# EAGLE board 602009781c (EAGLE 5.06)
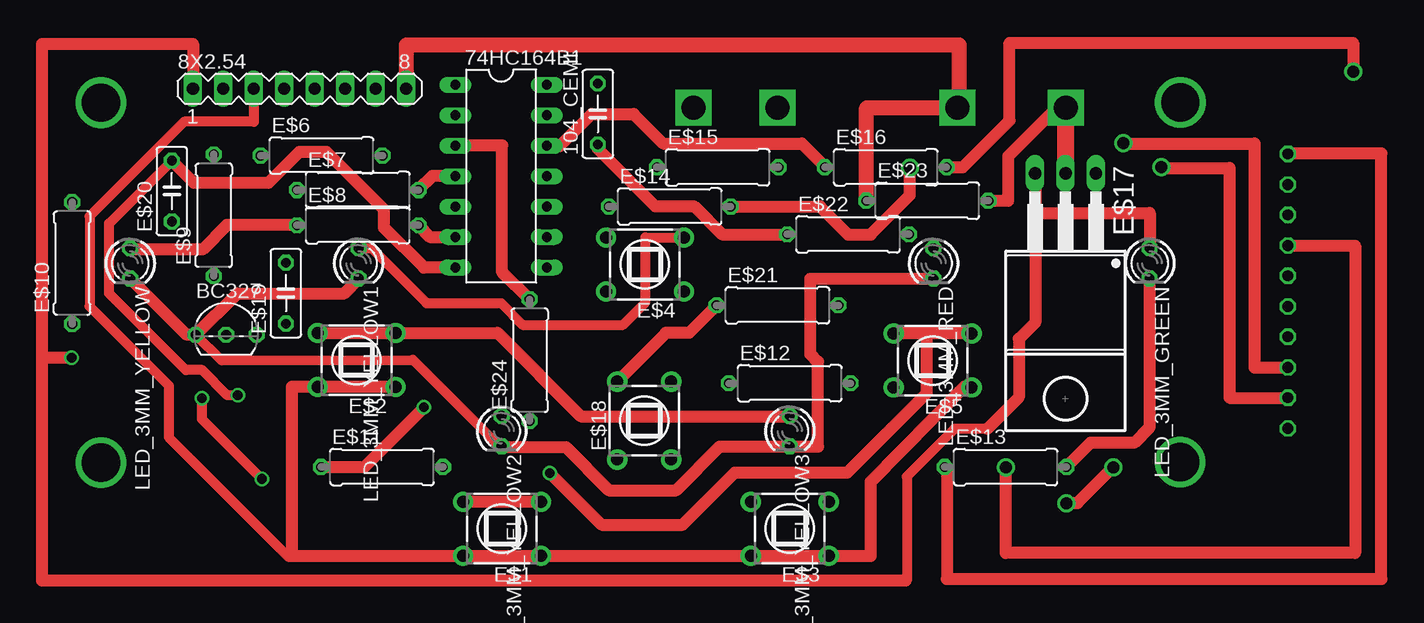
[diagram p0: board, top side]
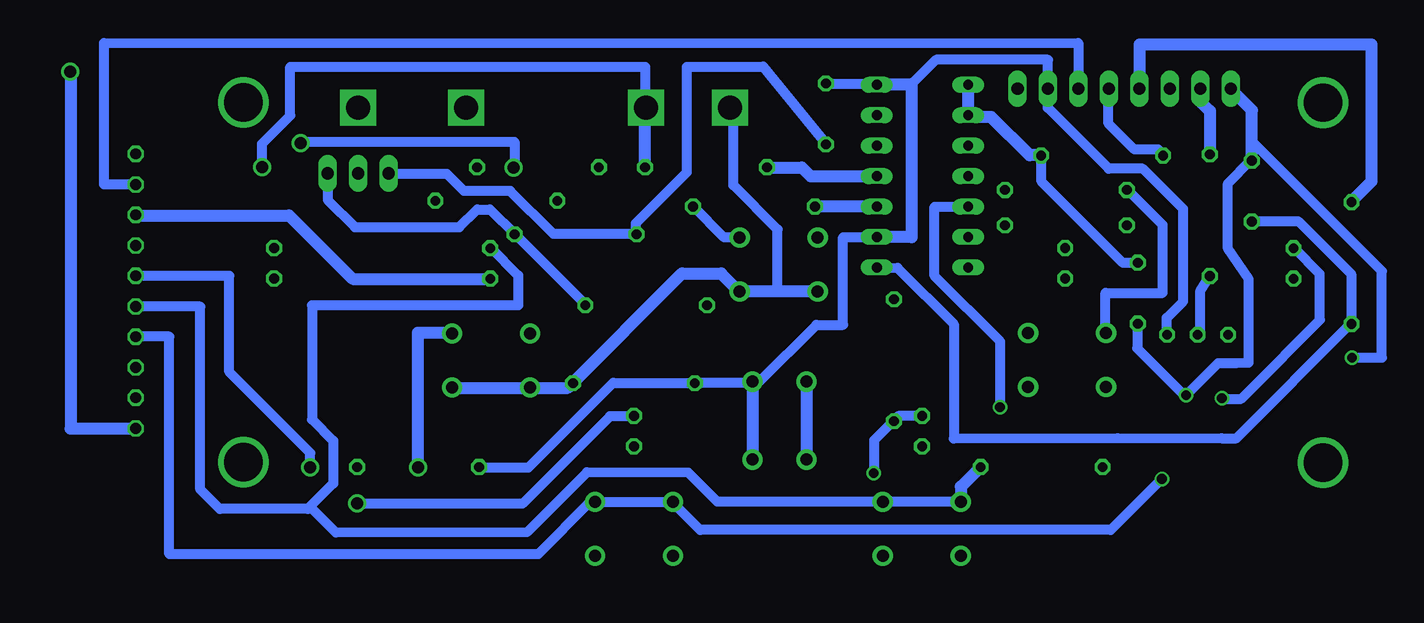
[diagram p1: board, bottom side, seen from below]

No outline drawn. Coordinates in mm, seen from the top.
Copper layers (1*16): Top 0.035mm / dielectric 1.5mm / Bottom 0.035mm
Design rules "default": minimum track width 10mil, minimum drill 24mil, track to track 8mil, track to pad 8mil, pad to pad 8mil, via to via 8mil, smd to smd 8mil, copper to edge 40mil, drill to drill 8mil, minimum pad ring 10mil, minimum via ring 8mil, stop-mask expansion 4mil, vias tented up to drill 0mil, thermal gap 10mil

## Footprints (pad centres in the part's own frame; a part is rotated, then mirrored left to right if it is on the bottom)
MA08-1 = drill 1.016 long: 1 -8.89,0; 2 -6.35,0; 3 -3.81,0; 4 -1.27,0; 5 1.27,0; 6 3.81,0; 7 6.35,0; 8 8.89,0
DIL14 = drill 0.813 long: 1 -7.62,-3.81; 2 -5.08,-3.81; 3 -2.54,-3.81; 4 0,-3.81; 5 2.54,-3.81; 6 5.08,-3.81; 7 7.62,-3.81; 8 7.62,3.81; 9 5.08,3.81; 10 2.54,3.81; 11 0,3.81; 12 -2.54,3.81; 13 -5.08,3.81; 14 -7.62,3.81
C050-025X075 = drill 0.813 octagon: 1 -2.54,0; 2 2.54,0
TO92- = drill 0.813 octagon: 1 -2.54,0; 2 0,0; 3 2.54,0
TL1105SP = drill 1 pad 1.676 round: 1 -2.25,3.25; 2 2.25,3.25; 3 -2.25,-3.25; 4 2.25,-3.25
0309/10 = drill 0.813 octagon: 1 -5.08,0; 2 5.08,0
T03B = drill 1.016 long: 1 -2.54,-11.43; 2 0,-11.43; 3 2.54,-11.43
LED3MM = drill 0.813 octagon: A -1.27,0; K 1.27,0

## Placement (x,y rotation side)
8X2.54  [MA08-1]  22.14,41.56 0 top
74HC164B1  [DIL14]  38.95,34.27 270 top
104_CEMI  [C050-025X075]  47.01,39.46 90 top
BC327  [TO92-]  16.02,21.04 0 top
E$1  [TL1105SP]  39.02,4.87 90 top
E$2  [TL1105SP]  26.9,18.93 90 top
E$3  [TL1105SP]  63.01,4.87 90 top
E$4  [TL1105SP]  50.94,26.9 90 top
E$5  [TL1105SP]  74.92,18.89 90 top
E$6  [0309/10]  23.98,35.99 0 top
E$7  [0309/10]  27,33.12 0 top
E$8  [0309/10]  27,30.17 0 top
E$9  [0309/10]  15,31.01 90 top
E$10  [0309/10]  3.19,27.02 90 top
E$11  [0309/10]  29.02,10.01 0 top
E$12  [0309/10]  63.01,17 0 top
E$13  [0309/10]  81,10.01 0 top
E$14  [0309/10]  53,31.74 0 top
E$15  [0309/10]  57,35.01 0 top
E$16  [0309/10]  71.01,35.01 0 top
E$17  [T03B]  86,23.07 180 top
E$18  [TL1105SP]  50.88,13.88 0 top
E$19  [C050-025X075]  21.01,24.51 90 top
E$20  [C050-025X075]  11.5,33.02 90 top
E$21  [0309/10]  61.99,23.5 0 top
E$22  [0309/10]  67.87,29.42 0 top
E$23  [0309/10]  74.48,32.22 0 top
E$24  [0309/10]  41.33,18.92 90 top
LED_3MM_GREEN  8mm ponad pow pcb  [LED3MM]  93.01,27 270 top
LED_3MM_RED  8mm nad pow pcb  [LED3MM]  74.99,26.99 270 top
LED_3MM_YELLOW  8mm ponad pow pcb  [LED3MM]  8.02,26.99 270 top
LED_3MM_YELLOW1  8mm ponad pow pcb  [LED3MM]  27.06,27 270 top
LED_3MM_YELLOW2  8mm ponad pow pcb  [LED3MM]  38.99,13 270 top
LED_3MM_YELLOW3  8mm ponad pow pcb  [LED3MM]  63.01,13.01 270 top

## Library data of the parts
8X2.54 = con-lstb
74HC164B1 = 40xx
104_CEMI E$6-E$16 E$19-E$24 = rcl
BC327 = maxim
E$1-E$5 E$18 = switch
E$17 = linear
LED_3MM_GREEN LED_3MM_RED LED_3MM_YELLOW LED_3MM_YELLOW1-LED_3MM_YELLOW3 = led

## Nets
S$25: E$23.2
S$27: E$16.2
S$99: E$21.2
S$113: 8X2.54.4

## Tracks (layer width: path | path; a pad name or v marks a point on that pad's centre or on a via)
S$1  (via drill 3.2)
  other vias: 5.58,40.4 5.58,10.38 95.57,40.42 95.55,10.43
S$2  (via drill 2)
  other vias: 55,39.99
S$3  (via drill 2)
  other vias: 61.99,39.99
S$4  (via drill 2)
  other vias: 77,39.99
S$5  (via drill 2)
  other vias: 86.02,39.99
S$6  (via drill 0.8)
  other vias: 3.15,19.14
S$7  (via drill 0.8)
  other vias: 14,15.74
S$8  (via drill 0.8)
  other vias: 16.99,15.99
S$9  (via drill 0.8)
  other vias: 19,9.02
S$10  (via drill 0.8)
  other vias: 32.5,15
S$11  (via drill 0.8)
  other vias: 43.01,9.51
S$12  (via drill 0.9)
  other vias: 104.54,15.8
S$13  (via drill 0.9)
  other vias: 104.54,18.32
S$14  (via drill 0.9)
  other vias: 104.54,20.88
S$15  (via drill 0.9)
  other vias: 104.54,23.4
S$16  (via drill 0.9)
  other vias: 104.54,25.96
S$17  (via drill 0.9)
  other vias: 104.54,28.49
S$18  (via drill 0.9)
  other vias: 104.54,31.05
S$19  (via drill 0.9)
  other vias: 104.54,33.57
S$20  (via drill 0.9)
  other vias: 104.54,36.13
S$21  (via drill 1)
  other vias: 90.81,37.01
S$22  (via drill 1)
  other vias: 94,35.01
S$23  (via drill 1)
  other vias: 86.08,7
S$24
  Top 1.422: 86.03,34.46 86.03,40.09
S$25
  Top 1.016: E$23.2 81.22,32.22 81.22,35.92 84.96,39.66
S$26  (via drill 1)
  other vias: 109.99,42.99
S$27
  Top 1.016: E$16.2 77.43,35.01 81.33,38.91 81.33,45.38 109.98,45.38 109.98,42.91
S$28
  Top 1.016: 56.92,23.5 54.62,21.2 52.69,21.2 48.61,17.12
S$29
  Top 1.016: 23.93,10.04 27.57,10.04 32.52,14.99
S$30
  Top 1.016: 30.14,16.7 21.5,16.7 21.5,2.59 66.32,2.59
S$31  (via drill 1)
  other vias: 90,10
S$32
  Top 1.016: 86.08,7.02 87,7.02 90,10.02
S$33
  Top 1.016: 93,25.72 93,13.32 91.72,12.04 88.08,12.04 86.08,10.04
S$34
  Top 1.016: 76.11,9.99 76.11,0.68 112.34,0.68 112.34,36.15 104.58,36.15
S$35  (via drill 1)
  other vias: 81.01,10
S$36
  Top 1.016: 104.53,28.48 110.14,28.48 110.14,2.84 81.02,2.84 81.02,10.04
S$37
  Top 1.016: 90.82,36.99 101.75,36.99 101.75,18.31 104.61,18.31
S$38
  Top 1.016: 94,34.95 99.67,34.95 99.67,15.78 104.57,15.78
S$39
  Bottom 1.016: 109.97,43.08 109.97,13.23 104.47,13.23
S$40
  Top 1.016: 83.47,34.5 83.47,31.19 93.01,31.19 93.01,28.24
S$41
  Top 1.016: 8.04,25.72 12.69,21.07 13.46,21.07
S$42
  Top 1.016: 35.14,34.28 33.22,34.28 32.08,33.14
S$43
  Top 1.016: 35.17,29.15 33.07,29.15 32.05,30.17
S$44
  Top 1.016: 21.94,30.2 16.09,30.2 14.05,28.16 8.01,28.16
S$45
  Top 0.813: 13.99,15.74 13.99,14.02 19.02,8.99
S$46
  Bottom 1.016: 34.06,10.06 35.76,8.36 35.76,7.05
S$47
  Top 0.813: 13.39,21.12 15.64,18.9 31.6,18.94 38.91,11.63
S$48
  Top 1.016: 35.77,7.13 42.31,7.13 42.31,7.15
S$49
  Top 1.016: 71.69,21.17 78.27,21.17 78.27,21.11
S$50
  Top 1.016: 38.95,11.68 44.32,11.68 47.92,8.08 53.55,8.08 57.19,11.72 65.37,11.72 65.37,18.78 64.72,19.43 64.72,25.72 75.04,25.72
S$51
  Top 1.016: 23.65,21.19 38.65,21.19 45.59,14.25 63.05,14.25
S$52
  Top 1.016: 41.27,24.01 39.03,26.25 39.03,36.83 35.15,36.83
S$53
  Top 1.016: 42.75,36.77 43.8,36.77 46.49,39.46 50,39.46 52.46,37 64.01,37 66,35.01
S$54
  Top 1.016: 47.02,36.91 47.02,36.53 51.79,31.76 55.02,31.76 57.38,29.4 62.89,29.4
S$55  (via drill 1)
  other vias: 73.04,34.99
S$56
  Top 1.27: 69.41,32.21 69.41,39.97 77,39.97
S$57
  Top 1.016: 58.09,31.74 65.53,31.74 67.88,29.39 69.74,29.39 73.02,32.67 73.02,35.03
S$58
  Top 1.27: 77.15,39.89 77.15,45.19 31.03,45.19 31.03,41.52
S$59
  Top 1.016: 43.02,9.5 47.33,5.19 54.08,5.19 58.44,9.55 67.81,9.55 74.44,16.21 74.44,21.06 74.49,21.11
S$60
  Top 1.016: 78.18,16.66 77.54,16.69 69.74,8.79 69.74,2.57 65.99,2.57
S$61
  Top 0.813: 17.01,16 16.12,16 14.03,18.09 12.66,18.09 6.26,24.49 6.26,30.32 11.55,35.61
S$62
  Top 0.813: 18.33,41.58 18.33,38.81 12.52,38.81 4.64,30.93 4.64,23.41 11.25,16.8 11.25,12.49 21.24,2.5
S$63
  Top 0.813: 79.47,13.19 76.73,13.19 72.76,9.22 72.76,0.53 72.69,0.53
  Top 1.016: 83.48,34.52 83.48,22.06 82.11,20.69 82.11,15.83 79.47,13.19 | 72.69,0.53 0.69,0.53 0.69,19.15 3.14,19.15
S$64
  Top 1.016: 3.13,19.12 0.69,19.12 0.69,45.3 13.27,45.3 13.27,41.38
S$65
  Top 1.016: 35.17,26.63 32.52,26.63 29.19,29.96 29.19,31.5 24.4,36.29 22.12,36.29 19.54,33.71 13.35,33.71 11.52,35.54
S$66
  Bottom 1.016: 11.49,35.51 11.49,39.77 13.25,41.53
S$67
  Bottom 1.016: 15.8,41.53 15.8,40.5 14.99,39.69 14.99,36.02
S$68
  Bottom 0.813: 17.05,15.93 14.31,18.67 12.8,18.67 11.76,18.72 11.76,25.67 13.5,28.22 13.5,33.66 11.57,35.59
S$69
  Bottom 0.813: 18.84,36.02 19.31,36.49 21.29,36.49 23.46,38.66 23.46,41.6
S$70
  Bottom 0.813: 14.02,15.69 12.38,15.69 11.62,16.45
S$71
  Bottom 0.813: 11.48,30.47 11.26,30.52 7.63,30.52 3.23,26.12 3.23,21.97
S$72
  Bottom 0.813: 104.56,33.58 107.18,33.58 107.17,45.36 25.97,45.39 25.97,41.44
S$73
  Bottom 0.813: 28.5,41.58 28.5,43.97 37.82,43.97 39.86,41.93 47.03,41.93
S$74
  Bottom 0.813: 54.18,29.16 55.49,29.16 58.06,31.73
S$75
  Bottom 1.016: 42.74,31.72 47.92,31.72
S$76
  Bottom 1.016: 51.92,34.99 49.02,34.99 48.29,34.26 42.58,34.26
S$77
  Bottom 1.016: 29.02,36.01 30.04,36.01 33.24,39.21 35.11,39.21 35.11,41.96
S$78
  Top 0.813: 27.05,28.26 28.14,28.26 32.73,23.67 38.95,23.67 40.75,21.87 49.11,21.87 50.98,23.74 50.98,29.15 54.34,29.15
S$79
  Top 1.016: 13.46,21.03 16.93,24.5 25.9,24.5 27.12,25.72
S$80
  Bottom 1.016: 104.54,30.99 91.76,30.99 86.46,25.69 75.01,25.69
S$81
  Bottom 0.813: 75.01,28.34 72.66,25.99 72.66,23.49 84.56,23.49 | 84.56,23.49 85.68,23.49 | 84.56,23.49 89.85,23.49 89.85,13.97 88.08,12.2 88.08,8.63 90.19,6.52 97.53,6.52 99.15,8.14 99.15,23.39 104.58,23.39
S$82
  Bottom 0.813: 89.99,9.95 89.99,11.18 96.75,17.94 96.75,25.94 104.58,25.94
S$83  (via drill 0.9)
  other vias: 104.54,13.22
S$84
  Bottom 0.813: 59.78,7.06 66.69,7.06 71,2.75 101.74,2.75 101.74,20.89 104.58,20.89
S$85
  Bottom 0.813: 35.84,7.12 56.06,7.12 58.47,9.53 66.92,9.57 71.92,4.57 87.84,4.53 89.96,6.65
S$86
  Bottom 0.813: 62.99,14.23 65.02,14.24 72.31,6.95 86.14,6.94
S$87
  Bottom 0.813: 75.92,9.97 71.81,9.97 64.74,17.04 57.94,17.04
S$88
  Bottom 0.813: 57.96,17.08 53.18,17.08 53.15,17.11 52.57,17.11 47.81,21.87 45.57,21.87 45.57,29.18 42.62,29.18
  Bottom 1.016: 42.82,41.94 39.86,41.94 39.86,29.18 42.62,29.18 42.92,29.18
S$89
  Bottom 1.016: 48.61,17.11 48.61,10.58
S$90
  Bottom 1.016: 53.11,17.14 53.11,10.58
S$91
  Bottom 1.016: 78.16,21.19 81.03,21.19 81.03,9.92
S$92
  Bottom 1.016: 78.2,16.62 68.52,16.62 58.99,26.15 55.74,26.15 54.2,24.61
S$93
  Bottom 1.016: 47.67,24.65 54.32,24.65
S$94
  Bottom 0.813: 51.03,24.58 51.03,29.82 54.72,33.51 54.72,40.37
S$95
  Bottom 1.016: 62.08,35.02 62.08,39.96
S$96
  Bottom 0.813: 94.01,35.04 94.01,36.97 91.65,39.33 91.65,43.39 62.07,43.39 62.07,38.15
S$97
  Bottom 0.813: 90.79,37.01 90.79,37.13 72.97,37.13 72.97,34.85
S$98
  Bottom 0.813: 88.54,34.54 88.54,32.29 86.26,30.01 77.57,30.01 76.08,31.5 75.01,31.5 72.93,29.42
S$99
  Bottom 0.813: E$21.2 67.07,23.59 72.92,29.44
S$100
  Bottom 0.813: 62.79,29.45 69.73,29.45 73.32,33.04 77.18,33.04 78.6,34.46 83.42,34.46 83.51,34.55
S$101
  Bottom 0.813: 62.84,29.4 62.84,30.35 58.59,34.6 58.59,43.39 52.24,43.41 46.93,36.87
S$102
  Bottom 0.813: 39.02,14.26 40.98,14.26 42.99,12.25 42.99,9.49
S$103
  Bottom 0.813: 18.98,9.06 23.27,4.77 57.5,4.77 59.81,7.08
S$104
  Bottom 0.813: 15.79,20.87 15.79,24.74 14.98,26.02
S$105
  Bottom 0.813: 21.06,21.98 21.06,19.9 17.09,15.93
S$106
  Bottom 0.813: 20.96,27.04 22.24,27.04 29.03,33.83 29.03,36.11
S$107
  Bottom 0.813: 23.7,21.18 23.7,24.53 18.93,24.53 18.93,30.21 21.95,33.23
S$108
  Bottom 0.813: 18.6,21.08 18.6,22.45 17.23,23.82 17.23,31.53 20.59,34.89 23.42,34.89 28.51,39.98 28.51,42.12
S$109
  Bottom 0.813: 11.8,16.26 5.82,22.28 5.84,26.12 7.93,28.22
S$110
  Bottom 0.813: 42.77,26.66 41.03,26.61 36.35,21.93 36.35,12.38 22.67,12.43 14.04,12.41 12.79,12.41 3.21,22.03
S$111
  Bottom 0.813: 32.48,14.94 32.48,20.47 37.96,25.95 37.96,31.72 35.17,31.72
S$112
  Bottom 0.813: 3.16,19.14 0.66,19.14 0.66,26.34 11.47,37.15
S$113
  Bottom 1.016: 3.21,32.14 1.51,33.84 1.51,45.24 20.87,45.24 8X2.54.4 20.87,40.84